# EAGLE board PCB (EAGLE 9.7.0)
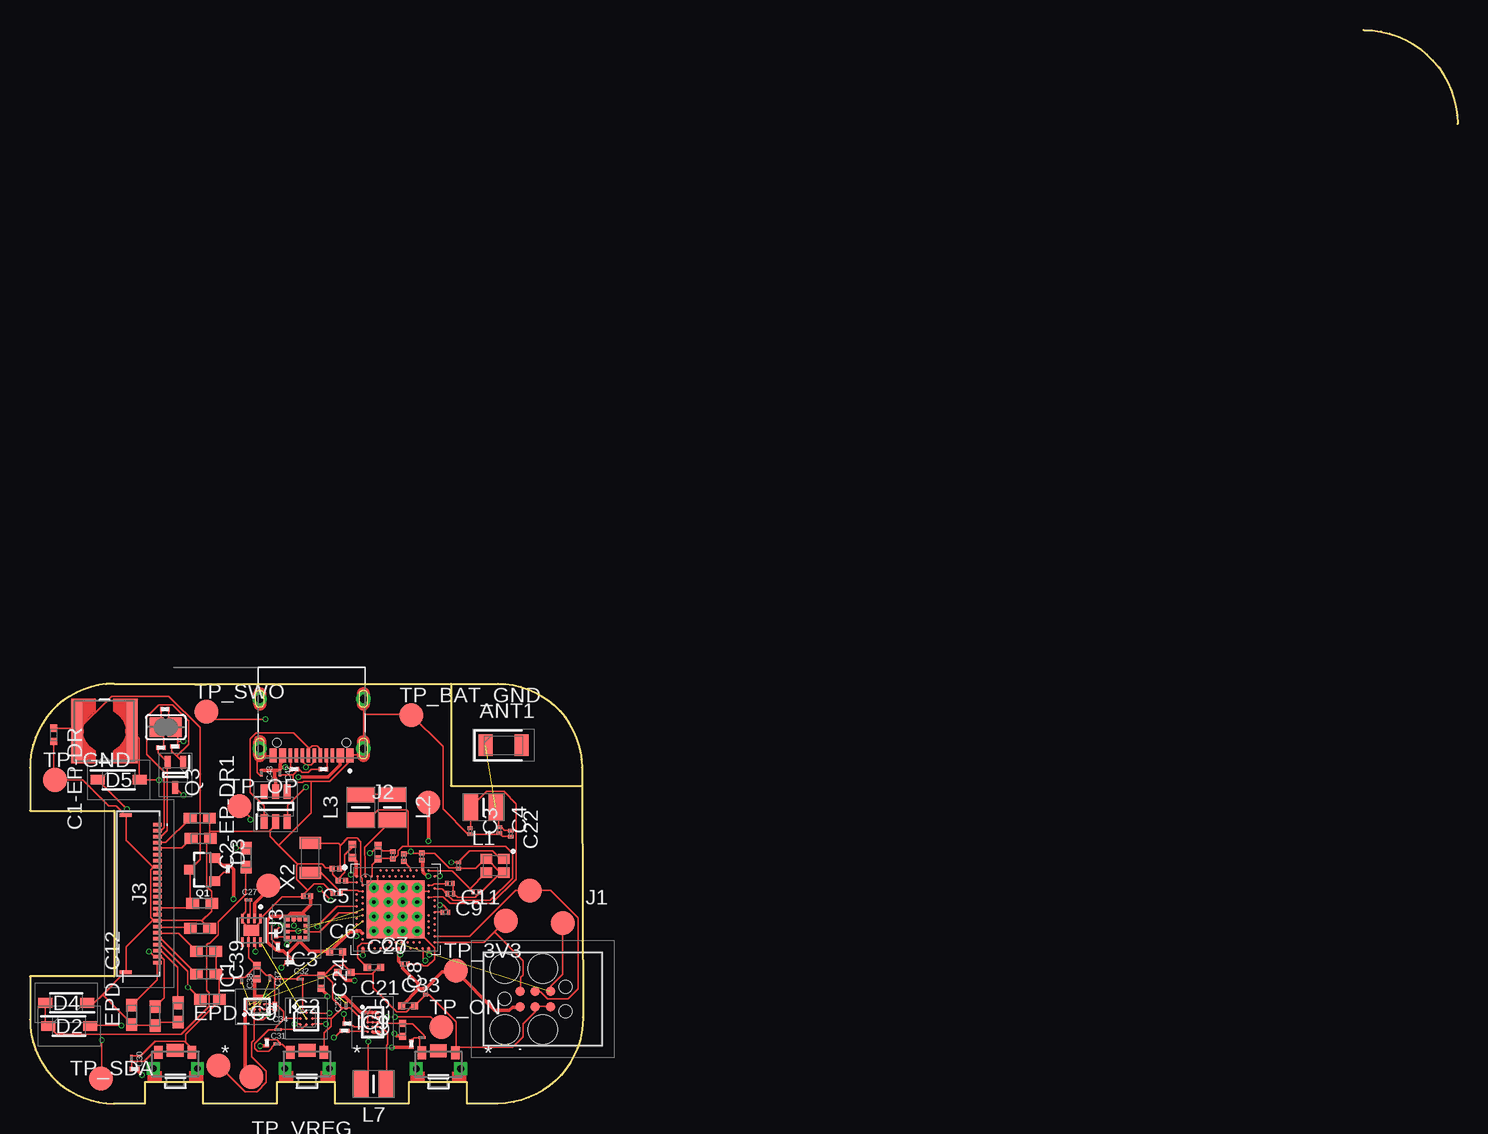
[diagram p0: board, top side]
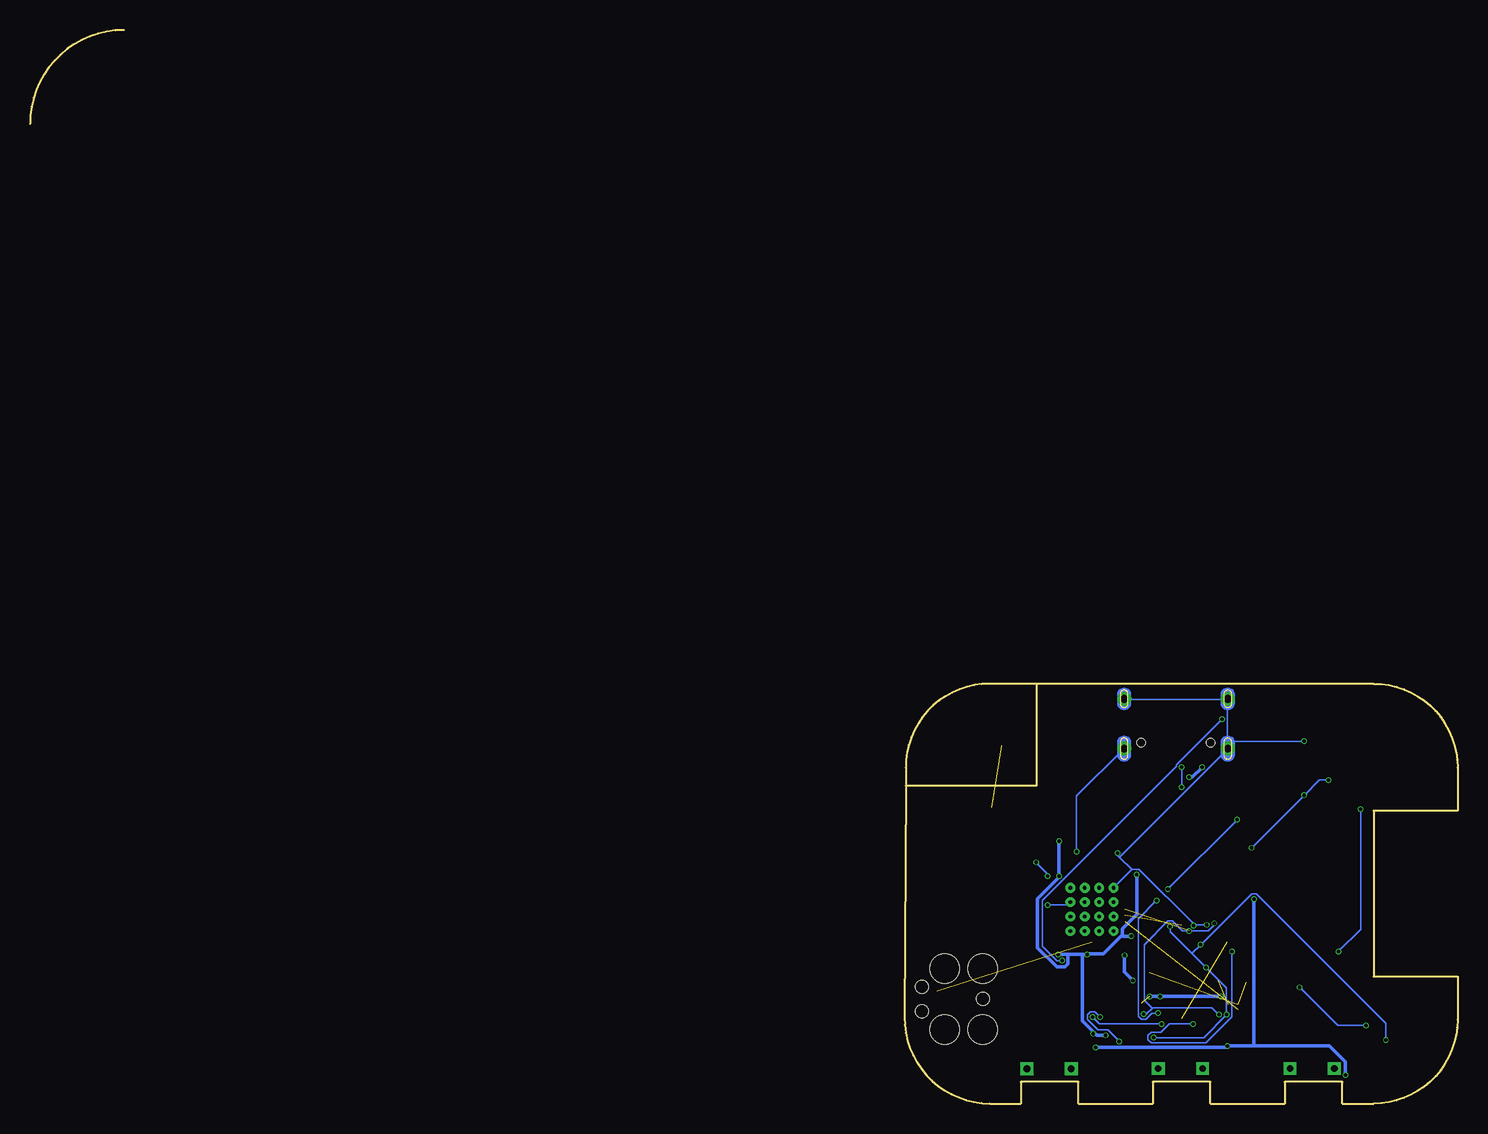
[diagram p1: board, bottom side, seen from below]

Size 119 x 89.5 mm. Coordinates in mm from the lower left corner, seen from the top.
Outline: 111.17,89.5 arc-90 119,81.67
Outline: 35.1,35 7,35 arc90 0,28 0,24.4 7,24.4 7,10.6 0,10.6 0,7 arc90 7,0 9.6,0 9.6,1.8 14.4,1.8 14.4,0 20.6,0 20.6,1.8 25.4,1.8 25.4,0 31.6,0 31.6,1.8 36.4,1.8 36.4,0 39,0 arc90 46.1,7.2 46,26.5
Outline: 35.1,35 35.1,26.5 46,26.5
Outline: 35.1,35 39,35 arc-90 46,28 46,26.5
Copper layers (1*16): Top / Bottom
Stack-up Default Layer Stack: Top User Defined 0.035mm / Dielectric-1 User Defined 1.6mm / Bottom User Defined 0.035mm
Design rules: minimum copper width classes=1 0.3mm, minimum copper width 5mil, minimum drill size 0.3mm, copper clearance wire_polygon to wire_polygon 5mil, copper clearance wire_polygon to pad_smd 5mil, copper clearance wire_polygon to via 5mil, copper clearance pad_smd to pad_smd 5mil, copper clearance pad_smd to via 5mil, copper clearance via to via 5mil, copper clearance smd to pad (same net) 5mil, copper clearance smd to via (same net) 5mil, copper clearance smd to smd (same net) 5mil, dimension clearance 0.2mm, restrict clearance 0mil, via restrict clearance 0mil, drill distance 6mil, keepout clearance 0mil
Net classes: 1 traseedeputere: width 0.3 mm

## Footprints (pad centres in the part's own frame; a part is rotated, then mirrored left to right if it is on the bottom)
2450AT18B100E_ANTC3216X140N = smd 1.15 x 1.8: 1 -1.5,0; 2 1.5,0
NORDIC_NRF_3_RESC0201_L = smd 0.28 x 0.43: 1 -0.255,0; 2 0.255,0
NORDIC_NRF_3_RESC0402_N = smd 0.6 x 0.6: 1 -0.55,0; 2 0.55,0
NORDIC_NRF_3_RESC0603_N = smd 1.05 x 0.9: 1 -0.8,0; 2 0.8,0
NORDIC_NRF_3_RESC0201_N = smd 0.4 x 0.45: 1 -0.305,0; 2 0.305,0
GRM011R60J152KE01L_2_CAPC0201X13N = smd 0.22 x 0.23: 1 -0.185,0; 2 0.185,0
ESP32_C6_LIBRARY_5_SOD3716X135N = smd 1.15 x 0.8: 1 -1.75,0; 2 1.75,0
ESP32_C6_LIBRARY_3_SOT95P280X145-6N = smd 1.2 x 0.6: 1 -1.25,0.95; 2 -1.25,0; 3 -1.25,-0.95; 4 1.25,-0.95; 5 1.25,0; 6 1.25,0.95
BQ25180YBGR_BGA8C40P2X4_100X155X50 = smd 0.2 x 0.2: A1 -0.2,0.6; A2 0.2,0.6; B1 -0.2,0.2; B2 0.2,0.2; C1 -0.2,-0.2; C2 0.2,-0.2; D1 -0.2,-0.6; D2 0.2,-0.6
DRV2605YZFR_BGA9C50P3X3_144X144X62 = smd 0.25 x 0.25: A1 -0.5,0.5; A2 0,0.5; A3 0.5,0.5; B1 -0.5,0; B2 0,0; B3 0.5,0; C1 -0.5,-0.5; C2 0,-0.5; C3 0.5,-0.5
BMA423_BMA423 = smd 0.3 x 0.35: 1 -0.75,-0.775; 2 -0.25,-0.775; 3 0.25,-0.775; 4 0.75,-0.775; 7 0.75,0.775; 8 0.25,0.775; 9 -0.25,0.775; 10 -0.75,0.775 | smd 0.35 x 0.3: 5 0.775,-0.25; 6 0.775,0.25; 11 -0.775,0.25; 12 -0.775,-0.25
RT6160AWSC_BGA15C40P3X5_140X230X60 = smd 0.216 x 0.216: A1 -0.4,0.8; A2 0,0.8; A3 0.4,0.8; B1 -0.4,0.4; B2 0,0.4; B3 0.4,0.4; C1 -0.4,0; C2 0,0; C3 0.4,0; D1 -0.4,-0.4; D2 0,-0.4; D3 0.4,-0.4; E1 -0.4,-0.8; E2 0,-0.8; E3 0.4,-0.8
TC2030-IDC_TC2030IDC = smd 0.783 x 0.783: 1 -0.953,-0.635; 2 -0.953,0.635; 3 0.317,-0.635; 4 0.317,0.635; 5 1.588,-0.635; 6 1.588,0.635 | hole 2.451: -2.223,-2.54; -2.223,2.54; 0.952,-2.54; 0.952,2.54 | hole 1.067: -2.223,0; 2.857,-1.016; 2.857,1.016
KH-TYPE-C-16P_KINGHELM_KH-TYPE-C-16P = smd 0.6 x 1.15: A1_B12 -3.2,4.725; A4_B9 -2.4,4.725; A9_B4 2.4,4.725; A12_B1 3.2,4.725 | smd 0.3 x 1.15: A5 -1.25,4.725; A6 -0.25,4.725; A7 0.25,4.725; A8 1.25,4.725; B5 1.75,4.725; B6 0.75,4.725; B7 -0.75,4.725; B8 -1.75,4.725 | drill 0.65 pad 1.05: SH1 -4.32,0; SH2 4.32,0; SH3 -4.32,4.15; SH4 4.32,4.15 | hole 0.7: -2.89,3.65; 2.89,3.65
503480-2400_5034802400 = smd 0.3 x 0.7: 1 -5.75,1.525; 2 -5.25,1.525; 3 -4.75,1.525; 4 -4.25,1.525; 5 -3.75,1.525; 6 -3.25,1.525; 7 -2.75,1.525; 8 -2.25,1.525; 9 -1.75,1.525; 10 -1.25,1.525; 11 -0.75,1.525; 12 -0.25,1.525; 13 0.25,1.525; 14 0.75,1.525; 15 1.25,1.525; 16 1.75,1.525; 17 2.25,1.525; 18 2.75,1.525; 19 3.25,1.525; 20 3.75,1.525; 21 4.25,1.525; 22 4.75,1.525; 23 5.25,1.525; 24 5.75,1.525 | smd 0.3 x 1: MP1 -6.54,-1.125; MP2 6.54,-1.125
MLP2016SR47MT0S1_INDC2016X100N = smd 1.2 x 2.2: 1 -1.028,0; 2 1.028,0
ESP32_C6_LIBRARY_2_IND_4828-WE-TPC_WRE = smd 0.9 x 5.3: 1 -2.286,0; 2 2.286,0
ESP32_C6_LIBRARY_4_ESP32_C6_LIBRARY_4_ESP32_C6_LIBRARY_4_ESP32_C6_LIBRARY_4_ESP32_WROVER_SPARKFUN-DISCRETESEMI_SOT23-3 = smd 0.8 x 0.9: 1 -0.95,-1; 2 0.95,-1; 3 0,1.1
ESP32_C6_LIBRARY_6_SOT65P210X110-3N = smd 1.05 x 0.5: 1 -1.05,0.65; 2 -1.05,-0.65; 3 1.05,0
CPF0201D7K68C1_0201 = smd 0.35 x 0.25: 1 0,0.275; 2 0,-0.275
ERA-1AEB3401C_0201 = smd 0.35 x 0.25: 1 0,0.275; 2 0,-0.275
ESP32_C6_LIBRARY_7_JUMPER_SJ = smd 1.168 x 1.6: 1 -0.762,0; 2 0.762,0
2025-10-22_07-23-44_LIBRARY_SW_EVP-AKE31A_PAN = smd 0.711 x 1.092: 1 -1.4,-0.972; 2 1.4,-0.972 | drill 0.559 pad 0.914 square: 3 -1.848,0.381; 4 1.848,0.381 | smd 1.397 x 1.092: 5 0,-1.124
HECTOR_WATCH_1_TP20R = smd 2 x 2: TP 0,0
ESP32_C6_LIBRARY_SON50P200X200X80-9N = smd 0.76 x 0.27: 1 -0.985,0.75; 2 -0.985,0.25; 3 -0.985,-0.25; 4 -0.985,-0.75; 5 0.985,-0.75; 6 0.985,-0.25; 7 0.985,0.25; 8 0.985,0.75 | smd 0.9 x 1.3: 9 0,0
NORDIC_NRF_4_AQFN50P700X700X85_HS-74N = smd 4.85 x 4.85: P$74 0,0 | drill 0.3 pad 0.6: P$75 -1.8,1.8; P$76 -0.6,1.8; P$77 0.6,1.8; P$78 1.8,1.8; P$79 -1.8,0.6; P$80 -0.6,0.6; P$81 0.6,0.6; P$82 1.8,0.6; P$83 -1.8,-0.6; P$84 -0.6,-0.6; P$85 0.6,-0.6; P$86 1.8,-0.6; P$87 -1.8,-1.8; P$88 -0.6,-1.8; P$89 0.6,-1.8; P$90 1.8,-1.8 | smd 0.2 x 0.2: P$A8 -1.25,3.25; P$A10 -0.75,3.25; P$A12 -0.25,3.25; P$A14 0.25,3.25; P$A16 0.75,3.25; P$A18 1.25,3.25; P$A20 1.75,3.25; P$A22 2.25,3.25; P$A23 2.75,3.25; P$AA24 3.25,-2.25; P$AB2 -2.75,-2.5; P$AC5 -2,-2.75; P$AC9 -1,-2.75; P$AC11 -0.5,-2.75; P$AC13 0,-2.75; P$AC15 0.5,-2.75; P$AC17 1,-2.75; P$AC19 1.5,-2.75; P$AC21 2,-2.75; P$AC24 3.25,-2.75; P$AD2 -2.75,-3.25; P$AD4 -2.25,-3.25; P$AD6 -1.75,-3.25; P$AD8 -1.25,-3.25; P$AD10 -0.75,-3.25; P$AD12 -0.25,-3.25; P$AD14 0.25,-3.25; P$AD16 0.75,-3.25; P$AD18 1.25,-3.25; P$AD20 1.75,-3.25; P$AD22 2.25,-3.25; P$AD23 2.75,-3.25; P$B1 -3.25,2.75; P$B3 -2.5,2.75; P$B5 -2,2.75; P$B7 -1.5,2.75; P$B9 -1,2.75; P$B11 -0.5,2.75; P$B13 0,2.75; P$B15 0.5,2.75; P$B17 1,2.75; P$B19 1.5,2.75; P$B24 3.25,2.75; P$C1 -3.25,2.25; P$D2 -2.75,2; P$D23 2.75,2; P$E24 3.25,1.75; P$F2 -2.75,1.5; P$F23 2.75,1.5; P$G1 -3.25,1.25; P$H2 -2.75,1; P$H23 2.75,1; P$J1 -3.25,0.75; P$J24 3.25,0.75; P$K2 -2.75,0.5; P$L1 -3.25,0.25; P$L24 3.25,0.25; P$M2 -2.75,0; P$N1 -3.25,-0.25; P$N24 3.25,-0.25; P$P2 -2.75,-0.5; P$P23 2.75,-0.5; P$R1 -3.25,-0.75; P$R24 3.25,-0.75; P$T2 -2.75,-1; P$T23 2.75,-1; P$U1 -3.25,-1.25; P$U24 3.25,-1.25; P$V23 2.75,-1.5; P$W1 -3.25,-1.75; P$W24 3.25,-1.75; P$Y2 -2.75,-2; P$Y23 2.75,-2
NORDIC_NRF_BT-XTAL_2016_N = smd 0.95 x 0.85: 1 -0.725,-0.575; 2 0.725,-0.575; 3 0.725,0.575; 4 -0.725,0.575
NORDIC_NRF_1_XTAL_3215_N = smd 1 x 1.8: 1 -1.25,0; 2 1.25,0

## Placement (x,y rotation side)
ANT1  2450AT18B100E_2450AT18B100E  [2450AT18B100E_ANTC3216X140N]  39.48,29.86 0 top
C1  12pF  [NORDIC_NRF_3_RESC0201_L]  35.72,19.85 270 top
C1-EP-DR  10uF  [NORDIC_NRF_3_RESC0402_N]  1.97,30.75 270 top
C2  12pF  [NORDIC_NRF_3_RESC0201_L]  37.19,17.65 0 top
C2-EP-DR1  4.7u/25V  [NORDIC_NRF_3_RESC0603_N]  18.02,20.51 90 top
C3  1pF  [NORDIC_NRF_3_RESC0201_L]  36.7,22.7 270 top
C4  1pF  [NORDIC_NRF_3_RESC0201_L]  39.12,22.8 270 top
C5  100nF  [NORDIC_NRF_3_RESC0201_N]  26,18.6 180 top
C6  4.7µF  [NORDIC_NRF_3_RESC0402_N]  25.52,12.65 0 top
C7  100nF  [NORDIC_NRF_3_RESC0201_L]  31.24,11.65 0 top
C8  100nF  [NORDIC_NRF_3_RESC0201_L]  32.99,9.35 270 top
C9  820pF  [NORDIC_NRF_3_RESC0201_L]  34.64,15.95 0 top
C10  N.C.  [NORDIC_NRF_3_RESC0201_L]  35.06,17.5 0 top
C11  100pF  [NORDIC_NRF_3_RESC0201_L]  34.99,18.35 180 top
C12  100nF  [NORDIC_NRF_3_RESC0201_N]  32.65,20.6 90 top
C13  N.C  [NORDIC_NRF_3_RESC0201_N]  31.17,20.5 90 top
C14  4.7µF  [NORDIC_NRF_3_RESC0402_N]  26.87,21.05 90 top
C15  1.0µF  [NORDIC_NRF_3_RESC0402_N]  29.02,20.95 90 top
C16  47nF  [NORDIC_NRF_3_RESC0201_N]  30.25,20.7 90 top
C17  12pF  [NORDIC_NRF_3_RESC0201_N]  25.5,19.6 0 top
C18  12pF  [NORDIC_NRF_3_RESC0201_N]  25.55,17.52 0 top
C19  100nF  [NORDIC_NRF_3_RESC0201_N]  23.1,17.3 180 top
C20  4.7µF  [NORDIC_NRF_3_RESC0402_N]  28.67,11.35 0 top
C21  4.7µF  [NORDIC_NRF_3_RESC0402_N]  26.22,10.95 0 top
C22  N.C.  [NORDIC_NRF_3_RESC0201_L]  40.08,22.5 270 top
C23  0.1uF  [GRM011R60J152KE01L_2_CAPC0201X13N]  26.35,8.17 90 top
C24  10uF  [NORDIC_NRF_3_RESC0402_N]  24.27,10.15 270 top
C25  22uF  [NORDIC_NRF_3_RESC0402_N]  31.07,6.15 90 top
C27  0.1uF  [GRM011R60J152KE01L_2_CAPC0201X13N]  18.21,16.97 0 top
C29  1uF  [GRM011R60J152KE01L_2_CAPC0201X13N]  32.67,5.51 180 top
C30  1uF  [GRM011R60J152KE01L_2_CAPC0201X13N]  8.45,3.77 270 top
C31  1uF  [GRM011R60J152KE01L_2_CAPC0201X13N]  20.61,4.97 0 top
C32  1uF  [GRM011R60J152KE01L_2_CAPC0201X13N]  22.53,10.37 0 top
C33  22uF  [NORDIC_NRF_3_RESC0402_N]  31.52,8.15 0 top
C34  0.1uF  [GRM011R60J152KE01L_2_CAPC0201X13N]  20.67,6.17 0 top
C37  1uF  [GRM011R60J152KE01L_2_CAPC0201X13N]  19.99,10.47 270 top
C38  1uF  [GRM011R60J152KE01L_2_CAPC0201X13N]  17.65,10.27 270 top
C39  10uF  [NORDIC_NRF_3_RESC0402_N]  18.92,10.95 90 top
C42  0.1uF  [GRM011R60J152KE01L_2_CAPC0201X13N]  20.83,27.57 270 top
C43  4.7uF  [GRM011R60J152KE01L_2_CAPC0201X13N]  19.29,27.57 270 top
D2  MBR0530  [ESP32_C6_LIBRARY_5_SOD3716X135N]  3.26,6.46 0 top
D3  ESP32_C6_LIBRARY_3_USBLC6-2SC6Y  [ESP32_C6_LIBRARY_3_SOT95P280X145-6N]  20.48,24.76 90 top
D4  MBR0530  [ESP32_C6_LIBRARY_5_SOD3716X135N]  3.02,8.4 180 top
D5  MBR0530  [ESP32_C6_LIBRARY_5_SOD3716X135N]  7.39,26.99 0 top
EPD_C1  1uF/50V  [NORDIC_NRF_3_RESC0603_N]  14.24,22.1 180 top
EPD_C2  1uF/50V  [NORDIC_NRF_3_RESC0603_N]  14.15,23.8 180 top
EPD_C5  1uF/50V  [NORDIC_NRF_3_RESC0603_N]  14.36,16.7 180 top
EPD_C6  1uF/50V  [NORDIC_NRF_3_RESC0603_N]  14.18,14.6 180 top
EPD_C7  1uF/50V  [NORDIC_NRF_3_RESC0603_N]  14.68,12.7 180 top
EPD_C8  1uF/50V  [NORDIC_NRF_3_RESC0603_N]  14.69,10.8 180 top
EPD_C9  1uF/50V  [NORDIC_NRF_3_RESC0603_N]  15,8.7 180 top
EPD_C10  1uF/50V  [NORDIC_NRF_3_RESC0603_N]  12.35,7.6 90 top
EPD_C11  1uF/50V  [NORDIC_NRF_3_RESC0603_N]  10.43,7.3 90 top
EPD_C12  1uF/50V  [NORDIC_NRF_3_RESC0603_N]  8.49,7.4 90 top
IC1  BQ25180YBGR_BQ25180YBGR  [BQ25180YBGR_BGA8C40P2X4_100X155X50]  18.93,8.06 90 top
IC2  DRV2605YZFR_DRV2605YZFR  [DRV2605YZFR_BGA9C50P3X3_144X144X62]  23.03,7.08 0 top
IC3  BMA423_BMA423  [BMA423_BMA423]  22.23,14.6 0 top
IC9  RT6160AWSC_RT6160AWSC  [RT6160AWSC_BGA15C40P3X5_140X230X60]  28.56,6.78 0 top
J1  TC2030-IDC_TC2030-IDC  [TC2030-IDC_TC2030IDC]  41.8,8.71 0 top
J2  KH-TYPE-C-16P_KH-TYPE-C-16P  [KH-TYPE-C-16P_KINGHELM_KH-TYPE-C-16P]  23.47,33.74 180 top
J3  503480-2400_503480-2400  [503480-2400_5034802400]  9.1,17.5 270 top
L1  3.9nH  [MLP2016SR47MT0S1_INDC2016X100N]  37.8,24.7 0 top
L2  10µH  [MLP2016SR47MT0S1_INDC2016X100N]  30.2,24.7 90 top
L3  15nH  [MLP2016SR47MT0S1_INDC2016X100N]  27.57,24.68 270 top
L5  68uH  [ESP32_C6_LIBRARY_2_IND_4828-WE-TPC_WRE]  6.21,31.06 180 top
L7  MLP2016SR47MT0S1_FTC252012SR47MBCA  [MLP2016SR47MT0S1_INDC2016X100N]  28.64,1.63 0 top
Q1  20V/4.2A/52mΩ/1.4W  [ESP32_C6_LIBRARY_4_ESP32_C6_LIBRARY_4_ESP32_C6_LIBRARY_4_ESP32_C6_LIBRARY_4_ESP32_WROVER_SPARKFUN-DISCRETESEMI_SOT23-3]  14.4,19.49 90 top
Q3  SI1308EDL-T1-GE3  [ESP32_C6_LIBRARY_6_SOT65P210X110-3N]  12.11,27.39 270 top
R1_EP_DR  0.47  [CPF0201D7K68C1_0201]  10.91,29.67 270 top
R1_USB  5k1  [ERA-1AEB3401C_0201]  24.47,27.87 90 top
R2  0  [CPF0201D7K68C1_0201]  26.23,6.07 90 top
R2_EP_DR  10k  [CPF0201D7K68C1_0201]  12.09,29.77 270 top
R2_USB  5k1  [ERA-1AEB3401C_0201]  22.05,27.87 90 top
R3  0  [CPF0201D7K68C1_0201]  20.51,14.17 0 top
R4  0  [CPF0201D7K68C1_0201]  26.47,6.67 90 top
R5  10k  [CPF0201D7K68C1_0201]  8.73,2.87 90 top
R7  10k  [CPF0201D7K68C1_0201]  31.79,4.97 0 top
R8  10k  [CPF0201D7K68C1_0201]  19.75,5.07 0 top
R9  10K  [CPF0201D7K68C1_0201]  20.41,8.07 0 top
R17  3K3  [CPF0201D7K68C1_0201]  20.67,13.07 180 top
R18  3K3  [CPF0201D7K68C1_0201]  21.63,11.77 270 top
R_PWR_EPD  10K  [CPF0201D7K68C1_0201]  16.49,19.57 180 top
R_TYPE_SEL  2.2  [CPF0201D7K68C1_0201]  11.25,32.87 270 top
SJ1  [ESP32_C6_LIBRARY_7_JUMPER_SJ]  11.32,31.38 180 top
SW_DN  2025-10-22_07-23-44_LIBRARY_EVP-AKE31ASW_EVP-AKE31A_PAN  [2025-10-22_07-23-44_LIBRARY_SW_EVP-AKE31A_PAN]  34.05,3.27 180 top
SW_ENT  2025-10-22_07-23-44_LIBRARY_EVP-AKE31ASW_EVP-AKE31A_PAN  [2025-10-22_07-23-44_LIBRARY_SW_EVP-AKE31A_PAN]  23.1,3.3 180 top
SW_UP  2025-10-22_07-23-44_LIBRARY_EVP-AKE31ASW_EVP-AKE31A_PAN  [2025-10-22_07-23-44_LIBRARY_SW_EVP-AKE31A_PAN]  12.11,3.3 180 top
TP_3.3V  HECTOR_WATCH_1_TPTP20R  [HECTOR_WATCH_1_TP20R]  33.2,25.08 0 top
TP_3V3  HECTOR_WATCH_1_TPTP20R  [HECTOR_WATCH_1_TP20R]  35.5,11.08 0 top
TP_BAT_GND  HECTOR_WATCH_1_TPTP20R  [HECTOR_WATCH_1_TP20R]  31.8,32.38 0 top
TP_GND  HECTOR_WATCH_1_TPTP20R  [HECTOR_WATCH_1_TP20R]  2.09,26.98 0 top
TP_ON  HECTOR_WATCH_1_TPTP20R  [HECTOR_WATCH_1_TP20R]  34.28,6.37 0 top
TP_OP  HECTOR_WATCH_1_TPTP20R  [HECTOR_WATCH_1_TP20R]  17.46,24.78 0 top
TP_RESET  HECTOR_WATCH_1_TPTP20R  [HECTOR_WATCH_1_TP20R]  44.42,15.03 0 top
TP_SCL  HECTOR_WATCH_1_TPTP20R  [HECTOR_WATCH_1_TP20R]  15.72,3.18 0 top
TP_SDA  HECTOR_WATCH_1_TPTP20R  [HECTOR_WATCH_1_TP20R]  5.92,2.08 0 top
TP_SWDCLK  HECTOR_WATCH_1_TPTP20R  [HECTOR_WATCH_1_TP20R]  41.69,17.76 0 top
TP_SWDIO  HECTOR_WATCH_1_TPTP20R  [HECTOR_WATCH_1_TP20R]  39.65,15.23 0 top
TP_SWO  HECTOR_WATCH_1_TPTP20R  [HECTOR_WATCH_1_TP20R]  14.69,32.68 0 top
TP_VBAT  HECTOR_WATCH_1_TPTP20R  [HECTOR_WATCH_1_TP20R]  19.88,18.18 0 top
TP_VREG  HECTOR_WATCH_1_TPTP20R  [HECTOR_WATCH_1_TP20R]  18.46,2.23 0 top
U3  ESP32_C6_LIBRARY_MAX17048G+T10  [ESP32_C6_LIBRARY_SON50P200X200X80-9N]  18.47,14.44 270 top
U$1  NORDIC_NRF_4_NRF52840_QF  [NORDIC_NRF_4_AQFN50P700X700X85_HS-74N]  30.47,16.18 0 top
X1  32MHz  [NORDIC_NRF_BT-XTAL_2016_N]  38.76,19.83 180 top
X2  32.768kHz  [NORDIC_NRF_1_XTAL_3215_N]  23.37,20.5 90 top

## Library data of the parts
ANT1 = InkTime_v5; ARROW_PART_NUMBER: 2450AT18B100E; ARROW_PRICE-STOCK: https://www.arrow.com/en/products/2450at18b100e/johanson-dielectrics?utm_currency=USD&region=nac; DESCRIPTION: Antennas 2.45GHz ANTENNA; HEIGHT: 1.4mm; MANUFACTURER_NAME: JOHANSON TECHNOLOGY; MANUFACTURER_PART_NUMBER: 2450AT18B100E; MOUSER_PART_NUMBER: 609-2450AT18B100E; MOUSER_PRICE-STOCK: https://www.mouser.co.uk/ProductDetail/Johanson-Technology/2450AT18B100E?qs=yCnrNFeXz%252Bh5MFsFIXGZGA%3D%3D
C1 C1-EP-DR C2 C2-EP-DR1 C3-C22 C24 C25 C33 C39 EPD_C1 EPD_C2 EPD_C5-EPD_C12 R1_EP_DR R1_USB R2 R2_EP_DR R2_USB R3-R5 R7-R9 R17 R18 R_PWR_EPD R_TYPE_SEL SJ1 TP_3.3V TP_3V3 TP_BAT_GND TP_GND TP_ON TP_OP TP_RESET TP_SCL TP_SDA TP_SWDCLK TP_SWDIO TP_SWO TP_VBAT TP_VREG U$1 X1 X2 = InkTime_v5
C23 C27 C29-C32 C34 C37 C38 C42 C43 = InkTime_v5; AVAILABILITY: In Stock; CHECK_PRICES: https://www.snapeda.com/parts/GRM011R60J152KE01L/Murata/view-part/?ref=eda; DESCRIPTION: SMD Capacitor X5R(EIA) with Capacitance: 1500pF Tol. 10%. Rated Voltage: 6.3Vdc; MF: Murata; MP: GRM011R60J152KE01L; PACKAGE: 0201 Murata; PRICE: None; SNAPEDA_LINK: https://www.snapeda.com/parts/GRM011R60J152KE01L/Murata/view-part/?ref=snap
D2 D4 D5 = InkTime_v5; AVAILABILITY: In Stock; CHECK_PRICES: https://www.snapeda.com/parts/MBR0530/Onsemi/view-part/?ref=eda; DESCRIPTION: Diode Schottky 30 V 500mA Surface Mount SOD-123; MF: ON Semiconductor; MP: MBR0530; PACKAGE: SOD-123-2 ON Semiconductor; PRICE: None; PURCHASE-URL: https://www.snapeda.com/api/url_track_click_mouser/?unipart_id=179458&manufacturer=ON Semiconductor&part_name=MBR0530&search_term=None; SNAPEDA_LINK: https://www.snapeda.com/parts/MBR0530/Onsemi/view-part/?ref=snap
D3 = InkTime_v5; AVAILABILITY: In Stock; CHECK_PRICES: https://www.snapeda.com/parts/USBLC6-2SC6Y/STMicroelectronics/view-part/?ref=eda; DESCRIPTION: 17V Clamp 5A (8/20µs) Ipp Tvs Diode Surface Mount SOT-23-6; MF: STMicroelectronics; MP: USBLC6-2SC6Y; PACKAGE: SOT-23-6 STMicroelectronics; PRICE: None; SNAPEDA_LINK: https://www.snapeda.com/parts/USBLC6-2SC6Y/STMicroelectronics/view-part/?ref=snap
IC1 = InkTime_v5; ARROW_PART_NUMBER: BQ25180YBGR; ARROW_PRICE-STOCK: https://www.arrow.com/en/products/bq25180ybgr/texas-instruments?utm_currency=USD&region=nac; DESCRIPTION: Charger IC Lithium Ion/Polymer, Lithium Iron Phosphate 8-DSBGA (1.6x1.1); HEIGHT: 0.5mm; MANUFACTURER_NAME: Texas Instruments; MANUFACTURER_PART_NUMBER: BQ25180YBGR; MOUSER_PART_NUMBER: 595-BQ25180YBGR; MOUSER_PRICE-STOCK: https://www.mouser.co.uk/ProductDetail/Texas-Instruments/BQ25180YBGR?qs=doiCPypUmgEWjAK%252BJAX6Tw%3D%3D
IC2 = InkTime_v5; ARROW_PART_NUMBER: DRV2605YZFR; ARROW_PRICE-STOCK: https://www.arrow.com/en/products/drv2605yzfr/texas-instruments?region=nac; DESCRIPTION: Haptic Driver for ERM/LRA with Built-In Library and Smart Loop Architecture; HEIGHT: 0.625mm; MANUFACTURER_NAME: Texas Instruments; MANUFACTURER_PART_NUMBER: DRV2605YZFR
IC3 = InkTime_v5; ARROW_PART_NUMBER: BMA423; ARROW_PRICE-STOCK: https://www.arrow.com/en/products/bma423/bosch; DESCRIPTION: Accelerometers Triaxial low-g 12bit Acceleration Sensor; HEIGHT: 1mm; MANUFACTURER_NAME: BOSCH; MANUFACTURER_PART_NUMBER: BMA423; MOUSER_PART_NUMBER: 262-BMA423; MOUSER_PRICE-STOCK: https://www.mouser.co.uk/ProductDetail/Bosch-Sensortec/BMA423?qs=HXFqYaX1Q2xC%252BSgeGoX3mg%3D%3D
IC9 = InkTime_v5; DESCRIPTION: Buck-Boost Regulator Positive Output Step-Up/Step-Down I2C DC-DC Controller IC 15-WL-CSP (BSC) (1.4x2.3); HEIGHT: 0.6mm; MANUFACTURER_NAME: RICHTEK; MANUFACTURER_PART_NUMBER: RT6160AWSC; MOUSER_PART_NUMBER: 835-RT6160AWSC; MOUSER_PRICE-STOCK: https://www.mouser.co.uk/ProductDetail/Richtek/RT6160AWSC?qs=amGC7iS6iy%2FLd9PSoixZXQ%3D%3D
J1 = InkTime_v5; DESCRIPTION: CABLE ADAPTER 6 POS; HEIGHT: 19mm; MANUFACTURER_NAME: Tag Connect; MANUFACTURER_PART_NUMBER: TC2030-IDC
J2 = InkTime_v5; AVAILABILITY: Not in stock; CHECK_PRICES: https://www.snapeda.com/parts/KH-TYPE-C-16P/Kinghelm/view-part/?ref=eda; MF: kinghelm; MP: KH-TYPE-C-16P; PACKAGE: None; PRICE: None; SNAPEDA_LINK: https://www.snapeda.com/parts/KH-TYPE-C-16P/Kinghelm/view-part/?ref=snap
J3 = InkTime_v5; DESCRIPTION: FFC & FPC Connectors 0.5mm FPC RA SMT Dual Contact 24Ckt; HEIGHT: 1.87mm; MANUFACTURER_NAME: Molex; MANUFACTURER_PART_NUMBER: 503480-2400; MOUSER_PART_NUMBER: 538-503480-2400; MOUSER_PRICE-STOCK: https://www.mouser.co.uk/ProductDetail/Molex/503480-2400?qs=OAhjpuo3Vu7efIoxFh9AOw%3D%3D
L1-L3 L7 = InkTime_v5; DESCRIPTION: SMD / SMT Inductors (Coils), L=0.47?H, L x W x T :; HEIGHT: 1mm; JLCPCB: https://jlcpcb.com/partdetail/6763488-FTC252012SR47MBCA/C5832368; MANUFACTURER_NAME: TDK; MANUFACTURER_PART_NUMBER: FTC252012SR47MBCA
L5 = InkTime_v5; COPYRIGHT: Copyright (C) 2024 Ultra Librarian. All rights reserved.; MANUFACTURER_PART_NUMBER: 744043680; MFR_NAME: Wurth Electronics
Q1 = InkTime_v5; PROD_ID: TRAN-14388
Q3 = InkTime_v5; AVAILABILITY: In Stock; CHECK_PRICES: https://www.snapeda.com/parts/SI1308EDL-T1-GE3/Vishay+Siliconix/view-part/?ref=eda; DESCRIPTION: Si1308EDL-T1-GE3 N-channel MOSFET Transistor, 1.5 A, 30 V, 3-Pin SC-70 | Siliconix / Vishay SI1308EDL-T1-GE3; MF: Vishay Siliconix; MP: SI1308EDL-T1-GE3; PACKAGE: SOT-323 Vishay Semiconductor; PRICE: None; PURCHASE-URL: https://www.snapeda.com/api/url_track_click_mouser/?unipart_id=274603&manufacturer=Vishay Siliconix&part_name=SI1308EDL-T1-GE3&search_term=None; SNAPEDA_LINK: https://www.snapeda.com/parts/SI1308EDL-T1-GE3/Vishay+Siliconix/view-part/?ref=snap
SW_DN SW_ENT SW_UP = InkTime_v5; COPYRIGHT: Copyright (C) 2025 Ultra Librarian. All rights reserved.; DIGI-KEY_PART_NUMBER_1: P123437TR-ND; DIGI-KEY_PART_NUMBER_2: P123437CT-ND; DIGI-KEY_PART_NUMBER_3: P123437DKR-ND; MANUFACTURER_NAME: Panasonic; MANUFACTURER_PART_NUMBER: EVP-AKE31A
U3 = InkTime_v5; AVAILABILITY: In Stock; CHECK_PRICES: https://www.snapeda.com/parts/MAX17048G+T10/Analog+Devices/view-part/?ref=eda; DESCRIPTION: 3µA 1-Cell/2-Cell Fuel Gauge with ModelGauge; MF: Analog Devices; MP: MAX17048G+T10; PACKAGE: TDFN-8 Maxim; PRICE: None; PURCHASE-URL: https://www.snapeda.com/api/url_track_click_mouser/?unipart_id=329239&manufacturer=Analog Devices&part_name=MAX17048G+T10&search_term=None; SNAPEDA_LINK: https://www.snapeda.com/parts/MAX17048G+T10/Analog+Devices/view-part/?ref=snap

## Nets
3V3/1.7D [traseedeputere]: Q1.2 R5.2 R7.2 R8.2 R_PWR_EPD.2
3V3/2.4A [traseedeputere]: C6.1 C7.1 C8.1 C12.1 C14.1 C19.1 C25.1 C33.1 IC3.3 IC3.7 IC3.10 IC9.E2 IC9.E3 J1.1 R17.1 R18.1 TP_3.3V.TP TP_3V3.TP U$1.P$A22 U$1.P$AD14 U$1.P$AD23 U$1.P$B1 U$1.P$W1 U$1.P$Y2
ALERT/1.6C: U3.5
ALERT/2.5C: U$1.P$J24
D+/1.5D: D3.4
D+/2.7D: U$1.P$AD6
D-/1.5D: D3.6
D-/2.7D: U$1.P$AD4
DEC3: C11.2 U$1.P$D23
DEC4_6: C10.1 C15.1 C16.1 L3.2 U$1.P$B5 U$1.P$E24
DN: D3.1 J2.A7 J2.B7
DP: D3.3 J2.A6 J2.B6
EPD_3V3: C1-EP-DR.1 EPD_C5.2 J3.15 J3.16 L5.2 Q1.3
EPD_BUSY/1.5D: J3.9
EPD_BUSY/2.2D: U$1.P$AD12
EPD_CS/1.4C: J3.12
EPD_CS/2.2D: U$1.P$K2
EPD_DC/1.5D: J3.11
EPD_DC/2.2D: U$1.P$AD10
EPD_RST/1.5D: J3.10
EPD_RST/2.2D: U$1.P$AC11
GDR: J3.2 Q3.1 R2_EP_DR.2
GND: C1-EP-DR.2 C1.2 C2.2 C3.2 C4.2 C5.2 C6.2 C7.2 C8.2 C9.2 C10.2 C11.1 C12.2 C13.2 C14.2 C15.2 C16.2 C17.1 C18.1 C19.2 C20.2 C21.2 C22.2 C23.1 C24.1 C25.2 C27.1 C29.1 C30.1 C31.1 C32.1 C33.2 C34.1 C37.1 C38.1 C39.2 C42.2 C43.2 D3.2 D4.1 EPD_C1.1 EPD_C2.1 EPD_C5.1 EPD_C6.1 EPD_C7.1 EPD_C8.1 EPD_C9.1 EPD_C10.1 EPD_C11.1 EPD_C12.1 IC1.D2 IC2.B1 IC2.B3 IC3.8 IC3.9 IC9.B1 IC9.C1 IC9.C2 IC9.C3 J1.3 J1.5 J2.A1_B12 J2.A12_B1 J2.SH1 J2.SH2 J2.SH3 J2.SH4 J3.8 J3.17 J3.MP1 J3.MP2 R1_USB.1 R2_EP_DR.1 R2_USB.2 R3.1 R9.1 R_TYPE_SEL.1 SJ1.1 SW_DN.1 SW_ENT.1 SW_UP.1 TP_BAT_GND.TP TP_GND.TP U3.1 U3.4 U3.6 U3.9 U$1.P$74 U$1.P$75 U$1.P$76 U$1.P$77 U$1.P$78 U$1.P$79 U$1.P$80 U$1.P$81 U$1.P$82 U$1.P$83 U$1.P$84 U$1.P$85 U$1.P$86 U$1.P$87 U$1.P$88 U$1.P$89 U$1.P$90 U$1.P$B7 U$1.P$F23 X1.2 X1.4
HAPTIC_EN/1.4C: IC2.A1
HAPTIC_EN/2.6A: U$1.P$U1
IMU_INT1: IC3.5 U$1.P$N1
IMU_INT2: IC3.6 U$1.P$P2
LX1: IC9.B2 IC9.B3 L7.1
LX2: IC9.D2 IC9.D3 L7.2
MOSI/1.5B: J3.14
MOSI/2.2D: U$1.P$B13
N$1: C2.1 U$1.P$A23 X1.3
N$2: C1.1 U$1.P$B24 X1.1
N$3: C3.1 L1.1 U$1.P$H23
N$4: L2.1 U$1.P$B3
N$5: L2.2 L3.1
N$6: ANT1.1 C4.1 C22.1 L1.2
N$7: C20.1 U$1.P$AC5
N$8: C5.1 U$1.P$C1
N$9: C17.2 U$1.P$D2 X2.2
N$10: C18.2 U$1.P$F2 X2.1
N$11: C13.1 U$1.P$A18
N$12: IC9.D1 R4.2
N$13: IC9.E1 R2.2
N$14: IC1.D1 R9.2
N$15: IC3.1 R3.2
N$16: C2-EP-DR1.1 D2.1 D4.2
N$17: C2-EP-DR1.2 D5.2 L5.1 Q3.3
N$18: C34.2 IC2.C2
N$19: C9.1 U$1.P$N24
N$20: C32.2 IC2.A2
N$21: J2.A5 R1_USB.2
N$22: R1_EP_DR.1 R_TYPE_SEL.2 SJ1.2
N$23: C27.2 U3.3
N$26: J2.B5 R2_USB.1
N$27: EPD_C2.2 J3.4
N$28: EPD_C1.2 J3.5
N$35: EPD_C6.2 J3.18
N$36: EPD_C7.2 J3.19
N$38: EPD_C8.2 J3.20
N$40: EPD_C10.2 J3.22
N$42: EPD_C12.2 J3.24
OUT+: IC2.A3 TP_OP.TP
OUT-: IC2.C3 TP_ON.TP
P0.04: U$1.P$J1
P0.09: U$1.P$L24
P0.13/1.5D: C30.2 R5.1 SW_UP.2
P0.13/2.6C: U$1.P$AD8
P0.14/1.5D: C31.2 R8.1 SW_ENT.2
P0.14/2.7C: U$1.P$AC9
P0.19: U$1.P$AC15
P0.20: U$1.P$AD16
P0.21: U$1.P$AC17
P0.22: U$1.P$AD18
P0.23: U$1.P$AC19
P0.24: U$1.P$AD20
P0.25: U$1.P$AC21
P0.26: U$1.P$G1
P0.27: U$1.P$H2
P0.28: U$1.P$B11
P0.29: U$1.P$A10
P0.30: U$1.P$B9
P0.31: U$1.P$A8
P1.01/1.6C: Q1.1 R_PWR_EPD.1
P1.01/2.4B: U$1.P$Y23
P1.02/1.6C: C29.2 R7.1 SW_DN.2
P1.02/2.8C: U$1.P$W24
P1.03: U$1.P$V23
P1.04: U$1.P$U24
P1.05: U$1.P$T23
P1.06: U$1.P$R24
P1.07: U$1.P$P23
P1.09: U$1.P$R1
P1.10: U$1.P$A20
P1.11: U$1.P$B19
P1.12: U$1.P$B17
P1.13: U$1.P$A16
P1.14: U$1.P$B15
P1.15: U$1.P$A14
PMIC_INT: IC1.A1 U$1.P$T2
PREVGH: D5.1 EPD_C11.2 J3.23
PREVGL: D2.2 EPD_C9.2 J3.21
RESE: J3.3 Q3.2 R1_EP_DR.2
RESET: J1.6 TP_RESET.TP U$1.P$AC13
SCK/1.5B: J3.13
SCK/2.2D: U$1.P$A12
SCL/1.4C: IC2.C1 U3.7
SCL/2.4C: IC1.B1 IC3.12 R4.1 R17.2 TP_SCL.TP U$1.P$M2
SDA/1.4C: IC2.B2 U3.8
SDA/2.4C: IC1.C1 IC3.2 R2.1 R18.2 TP_SDA.TP U$1.P$L1
SWDCLK: J1.4 TP_SWDCLK.TP U$1.P$AA24
SWDIO: J1.2 TP_SWDIO.TP U$1.P$AC24
SWO: TP_SWO.TP U$1.P$AD22
VBAT/1.2A [traseedeputere]: TP_VBAT.TP U3.2
VBAT/2.5C [traseedeputere]: C37.2 IC1.C2
VBUS/1.5D [traseedeputere]: C42.1 C43.1 D3.5 J2.A4_B9 J2.A9_B4
VBUS/2.6D [traseedeputere]: C21.1 C38.2 IC1.A2 U$1.P$AD2
VREG [traseedeputere]: C23.2 C24.2 C39.1 IC1.B2 IC9.A1 IC9.A2 IC9.A3 TP_VREG.TP

## Tracks (layer width: path | path; a pad name or v marks a point on that pad's centre or on a via)
3V3/1.7D  (via drill 0.3)
  Top 0.3: Q1.2 15.44,20.42 16.02,19.85 16.46,19.85 R_PWR_EPD.2 16.59,19.79 16.71,19.79 16.97,19.53 v16.97,17.05 | v9.35,2.39 9.03,2.7 9.03,2.83 R5.2 | v19.19,4.8 19.7,4.8 R8.2 | v30.18,4.67 31.76,4.67 R7.2
  Bottom 0.3: v9.35,2.39 9.35,3.47 10.68,4.8 16.97,4.8 | 16.97,4.8 v19.19,4.8 19.25,4.67 v30.18,4.67 | 16.97,4.8 v16.97,17.05
3V3/2.4A  (via drill 0.3)
  Top 0.3: 21.54,15.6 21.54,15.66 21.73,15.85 22.75,15.85 | 21.54,15.6 21.54,15.4 IC3.10 | 22.75,15.85 22.94,15.66 22.94,15.4 IC3.7 | C19.1 23.38,17.25 23.38,16.55 22.81,15.98 22.75,15.85 | 21.38,12.45 21.86,11.98 21.86,11.79 R18.1 | 21.38,12.45 21.09,12.74 20.71,12.74 R17.1 20.52,12.8 20.46,12.8 19.76,13.5 19.76,15.28 20.08,15.6 21.54,15.6 | 22.43,13.5 22.43,13.82 IC3.3 | 21.38,12.45 22.43,13.5 | 27.25,14.39 27.51,14.39 27.7,14.2 U$1.P$Y2 | 27.25,14.39 U$1.P$W1 | 27.13,14.32 26.68,14.32 25.03,12.67 C6.1 24.84,12.67 23.32,12.67 22.55,13.44 22.43,13.5 | 27.13,14.32 27.25,14.39 | J1.1 40.84,8.04 40.21,8.04 39.95,7.78 38.75,7.78 35.51,11.02 TP_3V3.TP 35.38,10.96 34.37,10.96 33.1,9.69 C8.1 32.97,9.56 32.4,9.56 | 32.4,9.56 31,8.16 C33.1 | 27.19,19.09 27.19,20.17 26.87,20.48 C14.1 | 27.19,19.09 27.19,18.96 U$1.P$B1 | 32.72,19.47 32.72,20.23 C12.1 | 32.72,19.47 U$1.P$A22 | IC9.E2 28.59,5.94 28.91,5.94 IC9.E3 29.1,5.94 v29.35,5.69 | 30.75,12.42 30.75,11.85 30.94,11.66 C7.1 31.06,11.53 31.06,11.28 32.34,10.01 32.34,9.69 32.4,9.56 | 30.75,12.42 30.75,12.93 U$1.P$AD14 | v33.29,12.42 33.22,12.48 U$1.P$AD23 | v30.87,12.42 30.75,12.42 | v30.37,5.82 30.56,5.63 31.06,5.63 C25.1 | v33.22,18.96 33.1,18.96 32.78,19.28 32.78,19.34 32.72,19.47 | v26.75,19.09 27.19,19.09 | v33.22,21.88 33.22,25.06 TP_3.3V.TP | v27.19,13.94 27.19,14.2 27.13,14.32
  Bottom 0.3: 31.26,12.42 v30.87,12.42 30.75,12.48 29.54,12.48 27.95,14.07 | 31.26,12.42 32.46,12.42 | 32.46,12.42 v33.29,12.42 | v29.35,5.69 30.05,5.69 30.27,5.91 | 30.27,5.91 31.26,6.9 31.26,12.42 | v30.37,5.82 30.27,5.91 | 32.46,12.42 32.46,11.66 32.72,11.4 33.41,11.4 35,12.99 35,17.05 33.22,18.83 v33.22,18.96 v33.22,21.88 | v26.75,19.09 26.75,15.79 27.95,14.58 27.95,14.07 | v27.19,13.94 27.89,13.94 27.95,14.07
DEC3
  Top 0.127: U$1.P$D23 33.22,18.2 33.54,18.2 33.67,18.33 34.68,18.33 C11.2
DEC4_6
  Top 0.127: U$1.P$E24 33.73,17.88 34.37,17.88 34.75,17.5 C10.1 34.81,17.37 35.26,16.93 38.37,16.93 40.21,18.77 40.21,20.87 39.64,21.44 31.51,21.44 | U$1.P$B5 28.52,18.96 28.52,19.91 28.97,20.36 C15.1 29.03,20.42 30.24,20.42 C16.1 30.3,20.36 30.68,20.74 30.68,21.06 31.06,21.44 31.51,21.44 | 31.51,21.44 31.51,24.36 31.38,24.48 29.03,24.48 28.21,23.66 27.64,23.66 L3.2
DN
  Top 0.127: 23.29,29.6 23.51,29.82 23.95,29.82 24.21,29.56 24.21,29.06 J2.B7 | 23.29,29.6 23.25,29.56 23.25,29.06 J2.A7 | 23.29,29.6 21.98,30.9 18.87,30.9 18.36,30.39 18.36,25.95 19.51,24.8 19.51,23.53 D3.1
DP  (via drill 0.3)
  Top 0.127: 23,28.23 22.75,28.49 22.75,28.99 J2.B6 | 23,28.23 23.45,28.23 23.7,28.49 23.7,28.99 J2.A6 | v23,26.39 21.48,24.87 21.48,23.53 D3.3 | 23,28.23 v23,28.04
  Bottom 0.127: v23,28.04 v23,26.39
EPD_3V3
  Top 0.127: C1-EP-DR.1 1.98,31.28 3.7,31.28 3.89,31.09 L5.2 3.95,31.09 6.81,33.95 11.57,33.95 14.17,31.34 14.17,20.36 13.35,19.53 Q1.3 13.35,19.47 13.35,16.93 13.54,16.74 EPD_C5.2 13.54,16.67 13.16,16.29 10.68,16.29 J3.15 10.62,16.23 10.62,15.79 J3.16
GDR
  Top 0.127: 12.24,28.96 12.71,28.49 Q3.1 | 12.24,28.96 11.82,29.37 11.82,29.76 R2_EP_DR.2 | 12.24,28.96 13.22,29.95 13.22,31.91 11.89,33.25 10.74,33.25 9.73,32.23 9.73,29.12 11.19,27.66 11.19,23.02 10.94,22.77 10.68,22.77 J3.2
GND  (via drill 0.3)
  Top 0.127: v34.18,16.55 34.43,16.55 34.87,16.1 34.87,15.98 C9.2 | 28.71,18.01 28.97,18.26 28.97,18.9 U$1.P$B7 | U$1.P$F23 33.16,17.69 32.52,17.69 32.27,17.95 U$1.P$74 | C7.2 31.51,11.59 32.65,11.59 32.78,11.47 33.16,11.47 33.73,12.04 33.73,12.99 32.4,14.32 32.27,14.32 U$1.P$74 | U$1.P$74 28.65,15.53 28.65,14.39 U$1.P$87 28.71,14.39 29.86,14.39 U$1.P$88 | U$1.P$83 28.65,15.6 U$1.P$74 | U$1.P$84 29.86,15.6 29.86,15.91 U$1.P$74 | U$1.P$79 28.71,16.8 29.29,17.37 U$1.P$74 | U$1.P$80 29.86,16.8 U$1.P$74 | U$1.P$76 29.86,17.95 29.35,17.44 U$1.P$74 | U$1.P$89 31.13,14.39 31.64,14.9 U$1.P$74 | U$1.P$85 31.06,15.6 U$1.P$74 | U$1.P$81 31.06,16.8 U$1.P$74 | U$1.P$90 U$1.P$74 | U$1.P$77 31.13,17.95 31.7,17.37 U$1.P$74 | U$1.P$86 32.21,15.53 31.7,15.02 U$1.P$74 | U$1.P$78 32.27,18.01 U$1.P$74 | U$1.P$82 32.21,16.8 31.7,17.31 U$1.P$74 | C16.2 30.24,21.06 29.41,21.06 29.03,21.44 C15.2 28.97,21.44 28.4,20.87 v28.33,20.87 | IC3.8 22.43,15.4 21.98,15.4 IC3.9 21.98,15.34 v21.98,14.83 | v20.91,14.9 20.91,14.83 20.52,14.45 R3.1 | 28.71,18.01 U$1.P$74 | 28.71,18.01 U$1.P$75 | C22.2 40.02,22.26 39.38,22.26 39.13,22.52 C4.2 39.07,22.52 39,22.45 36.72,22.45 C3.2 36.65,22.45 36.52,22.45 34.43,24.55 34.43,29.76 31.83,32.36 TP_BAT_GND.TP 31.76,32.42 27.83,32.42 | 12.33,30.2 12.33,31.15 12.14,31.34 SJ1.1 12.08,31.41 11.57,31.91 11.57,32.87 R_TYPE_SEL.1 | 12.33,30.2 12.33,29.82 R2_EP_DR.1 | 18.94,28.99 18.94,29.37 19.13,29.56 J2.SH4 | 18.94,28.99 18.94,27.6 19.19,27.34 19.25,27.34 C43.2 | 18.94,28.99 20.27,28.99 J2.A12_B1 | v12.78,30.2 12.33,30.2 | C11.1 35.26,18.33 35.26,17.5 C10.2 35.64,17.18 37.1,17.18 37.41,17.5 37.41,17.63 C2.2 37.48,17.69 37.67,17.69 39.26,19.28
  Top 0.127: 31.76,20.87 32.59,20.87 C12.2 32.65,20.87 33.73,20.87 34.94,19.66 35.64,19.66 35.7,19.59 C1.2 35.76,19.59 37.16,19.59 37.99,20.42 X1.2 38.05,20.42 39.19,19.28 39.26,19.28 | 31.76,20.87 31.19,20.87 C13.2 | 39.26,19.28 39.45,19.28 X1.4 39.26,19.28 | 21.92,27.41 20.84,27.41 C42.2 | 21.92,27.41 22.36,27.85 R2_USB.2 22.43,27.85 22.68,27.6 23.19,27.6 23.45,27.85 24.14,27.85 R1_USB.1 | 27.83,32.42 27.83,33.69 J2.SH1 | 27.83,32.42 27.83,29.63 J2.SH3 27.76,29.56 27.25,29.06 26.68,29.06 J2.A1_B12 26.62,28.99 26.62,28.49 24.97,26.84 23.45,26.84 | 21.92,27.41 21.92,27.02 22.17,26.77 22.75,26.77 22.81,26.84 23.45,26.84 | v31.76,20.99 31.76,20.87 | EPD_C10.1 12.33,6.77 10.74,6.77 10.49,6.51 EPD_C11.1 10.43,6.51 8.59,6.51 8.52,6.58 EPD_C12.1 8.46,6.64 6.05,9.05 | 6.05,9.05 5.41,8.42 4.78,8.42 D4.1 | 6.05,9.05 7.95,10.96 J3.MP2 8.01,11.02 8.01,13.05 10.27,15.31 | C1-EP-DR.2 1.98,30.2 1.98,27.09 TP_GND.TP 2.11,26.96 4.39,26.96 6.55,24.8 7.19,24.8 7.95,24.04 J3.MP1 8.01,23.98 8.01,21.95 10.27,19.69 | 14.33,15.25 14.94,14.64 EPD_C6.1 | 14.33,15.25 14.3,15.28 10.68,15.28 J3.17 10.62,15.28 10.3,15.28 10.27,15.31 | 10.27,19.69 10.05,19.47 10.05,15.53 10.27,15.31 | 10.27,19.69 10.3,19.72 10.62,19.72 J3.8 | 14.33,15.25 15.13,16.04 15.13,16.67 EPD_C5.1 15.13,16.74 15.13,17.69 14.74,18.07 14.74,21.82 15,22.07 EPD_C1.1 15,22.14 15,22.71 | 15,22.71 15,23.79 EPD_C2.1 | 19.98,22.74 19.95,22.71 15,22.71 | 19.98,22.74 20.46,23.21 20.46,23.47 D3.2 | C14.2 26.81,21.56 26.81,21.31 26.24,20.74 26.24,19.28 25.67,18.71 C5.2 25.67,18.64 25.22,19.09 25.22,19.59 C17.1 25.16,19.66 24.65,19.66 24.33,19.98 22.36,19.98 22.33,19.95
  Top 0.127: 23.16,17.79 23.7,18.33 24.46,18.33 25.22,17.56 C18.1 | 23.16,17.79 22.81,17.44 C19.2 22.75,17.25 21.03,17.25 19.25,15.47 U3.1 19.19,15.4 19.19,15.09 18.49,14.39 U3.9 | C27.1 17.98,16.93 17.98,15.98 17.73,15.72 17.73,15.47 U3.4 17.73,15.4 17.73,15.15 18.43,14.45 U3.9 | U3.9 18.43,14.39 18.24,14.2 18.24,13.5 U3.6 18.24,13.44 18.24,12.17 18.87,11.53 C39.2 | 22.33,19.95 22.24,19.85 22.24,18.71 23.16,17.79 | 22.33,19.95 20.75,21.53 | 20.75,21.53 20.02,22.26 20.02,22.71 19.98,22.74 | J1.5 43.38,8.1 42.18,8.1 J1.3 42.11,8.04 42.11,7.66 41.1,6.64 41.1,5.56 40.21,4.67 35.51,4.67 | 35.51,4.67 35.51,6.83 33.29,9.05 33.03,9.05 C8.2 32.97,9.05 32.08,8.16 C33.2 32.02,8.1 31.83,8.1 31.38,7.66 30.56,7.66 28.59,9.63 28.59,10.83 28.56,10.86 | 35.51,4.67 35.51,4.29 SW_DN.1 35.51,4.67 | C29.1 32.84,5.56 32.84,5.69 31.89,6.64 31.13,6.64 C25.2 28.91,6.71 IC9.C3 28.91,6.77 28.59,6.77 IC9.C2 28.52,6.77 28.21,6.77 IC9.C1 28.14,6.83 28.14,7.15 IC9.B1 28.08,7.15 27.51,7.15 26.68,7.97 26.37,7.97 C23.1 26.3,7.97 26.05,7.97 26.02,7.94 | 25.09,7.09 25.16,7.09 26.02,7.94 | 25.09,7.09 23.57,7.09 IC2.B3 | 25.09,7.09 25.09,6.45 24.52,5.88 24.52,4.29 SW_ENT.1 | C24.1 22.55,10.71 22.36,10.52 22.36,10.39 C32.1 22.3,10.39 20.4,10.39 | 26.14,11.56 26.75,10.96 C21.2 26.81,10.9 26.87,10.83 28.52,10.83 28.56,10.86 | 26.14,11.56 26.11,11.59 26.11,12.61 C6.2 | 28.56,10.86 29.03,11.34 29.16,11.34 C20.2 | C24.1 24.52,10.71 24.56,10.74 | 24.56,10.74 25.35,11.53 26.11,11.53 26.14,11.56 | C24.1 | IC1.D2 19.57,8.29 20.4,8.29 R9.1 | C31.1 20.4,4.93 20.14,4.67 20.14,4.61 19.89,4.36 19,4.36 18.75,4.61 18.75,4.99 19.89,6.13 20.46,6.13 C34.1 20.52,6.2 20.52,6.39 21.19,7.05
  Top 0.127: 21.19,7.05 21.22,7.09 22.49,7.09 IC2.B1 | R9.1 20.46,8.29 20.59,8.16 20.65,8.16 21.16,7.66 21.16,7.09 21.19,7.05 | 12.94,5.15 13.47,4.61 13.47,4.29 SW_UP.1 | 12.94,5.15 12.9,5.18 10.43,5.18 9.22,3.97 8.46,3.97 C30.1 | C39.2 18.87,11.47 17.92,10.52 17.67,10.52 C38.1 17.6,10.45 15.76,10.45 | C39.2 18.94,11.47 19.7,10.71 19.95,10.71 C37.1 20.02,10.64 20.14,10.64 20.4,10.39 | EPD_C7.1 15.51,12.67 15.51,10.83 EPD_C8.1 | 15.76,10.45 15.76,10.52 15.51,10.77 EPD_C8.1 | 15.76,10.45 15.76,8.74 EPD_C9.1 15.76,8.67 15.76,8.55 12.97,5.75 12.97,5.18 12.94,5.15 | 15.76,10.45 EPD_C8.1 | 20.4,10.39 20.4,8.36 R9.1 | 26.02,7.94 25.22,8.74 25.22,10.07 24.56,10.74 | 23.45,26.84 23.45,24.23 20.75,21.53
  Bottom 0.127: v34.18,16.55 32.46,16.55 32.27,16.74 U$1.P$82 | v20.91,14.9 21.92,14.9 21.95,14.93 | 21.95,14.93 26.56,19.53 27.13,19.53 27.16,19.5 | 27.16,19.5 28.65,18.01 U$1.P$75 | v21.98,14.83 21.98,14.9 21.95,14.93 | v28.33,20.87 28.33,20.68 28.18,20.52 | 27.16,19.5 28.18,20.52 | 19.19,30.2 19.19,33.69 J2.SH2 19.25,33.69 27.76,33.69 J2.SH1 | 19.19,30.2 19.19,29.63 J2.SH4 19.13,29.56 28.18,20.52 | 19.19,30.2 v12.78,30.2 | v31.76,20.99 31.76,25.63 27.83,29.56 J2.SH3
IMU_INT1
  Top 0.127: U$1.P$N1 27.19,15.91 25.73,15.91 24.14,14.32 23.06,14.32 IC3.5
IMU_INT2  (1 unrouted)
LX1  (via drill 0.3)
  Top 0.127: IC9.B2 28.59,7.15 28.91,7.15 IC9.B3 28.97,7.21 v29.8,7.21 | v28.21,5.18 28.21,2.26 27.64,1.69 L7.1
  Bottom 0.127: v29.8,7.21 30.24,7.66 30.62,7.66 30.87,7.4 30.87,7.02 29.98,6.13 29.16,6.13 v28.21,5.18
LX2
  Top 0.127: IC9.D2 28.59,6.39 28.91,6.39 IC9.D3 29.29,6.39 29.8,5.88 29.8,4.93 29.73,4.86 29.73,1.69 L7.2
N$1
  Top 0.127: 36.68,17.91 36.91,17.69 C2.1 | 36.68,17.91 35.19,19.41 33.22,19.41 U$1.P$A23 | 36.68,17.91 37.99,19.21 X1.3
N$2  (via drill 0.3)
  Top 0.127: v34.18,18.96 33.73,18.96 U$1.P$B24 | v35.13,20.1 35.7,20.1 C1.1 35.76,20.17 36.65,21.06 38.56,21.06 39.19,20.42 39.45,20.42 X1.1
  Bottom 0.127: v34.18,18.96 34.18,19.15 v35.13,20.1
N$3
  Top 0.127: U$1.P$H23 33.54,17.18 33.6,17.25 34.43,17.25 35,16.67 38.49,16.67 40.53,18.71 40.53,24.99 39.51,26.01 38.05,26.01 36.78,24.74 L1.1 36.72,24.68 36.72,22.96 C3.1
N$4
  Top 0.127: U$1.P$B3 27.95,18.96 27.95,20.61 27.89,20.68 27.89,21.37 30.18,23.66 L2.1
N$5
  Top 0.127: L3.1 27.64,25.76 30.18,25.76 L2.2
N$6  (1 unrouted)
  Top 0.127: C22.1 40.02,22.77 39.57,22.77 39.32,23.02 39.13,23.02 C4.1 39.07,23.09 39.07,24.48 38.88,24.68 L1.2
N$7
  Top 0.127: U$1.P$AC5 28.46,13.37 27.64,13.37 27.32,13.05 27.32,12.17 28.08,11.4 C20.1
N$8
  Top 0.127: U$1.P$C1 27.19,18.45 26.49,18.45 26.37,18.58 C5.1
N$9
  Top 0.127: 25.89,21.53 25.86,21.5 25.86,19.66 C17.2 | 25.89,21.53 26.49,22.14 27.25,22.14 27.57,21.82 27.57,18.9 27.7,18.77 27.7,18.2 U$1.P$D2 | 25.89,21.53 25.73,21.69 23.38,21.69 X2.2
N$10
  Top 0.127: U$1.P$F2 27.7,17.69 27.38,17.69 27.32,17.75 26.05,17.75 25.86,17.56 C18.2 25.86,17.63 24.27,19.21 23.38,19.21 X2.1
N$11
  Top 0.127: U$1.P$A18 31.7,19.47 31.7,19.66 31.19,20.17 C13.1
N$12
  Top 0.127: IC9.D1 28.14,6.39 27,6.39 26.75,6.64 R4.2
N$13
  Top 0.127: IC9.E1 28.14,6.01 26.62,6.01 26.56,6.07 R2.2
N$14
  Top 0.127: IC1.D1 19.57,7.85 20.4,7.85 R9.2
N$15
  Top 0.127: IC3.1 21.48,13.88 20.52,13.88 R3.2
N$16
  Top 0.127: C2-EP-DR1.1 17.98,19.66 17.98,17.44 15.7,15.15 15.7,14.07 15,13.37 14.87,13.37 14.74,13.25 14.74,9.44 14.94,9.24 14.94,8.1 12.59,5.75 2.23,5.75 1.54,6.45 D2.1 1.47,6.51 1.28,6.71 1.28,8.36 D4.2
N$17  (via drill 0.3)
  Top 0.127: L5.1 8.52,31.02 9.09,30.45 9.09,27.02 D5.2 9.16,26.96 v10.74,26.96 | v17.16,21.31 17.98,21.31 C2-EP-DR1.2 | v12.78,25.69 12.14,26.33 Q3.3
  Bottom 0.127: v17.16,21.31 v12.78,25.69 11.51,26.96 v10.74,26.96
N$18
  Top 0.127: C34.2 20.91,6.2 22.62,6.2 23,6.58 IC2.C2
N$19
  Top 0.127: U$1.P$N24 33.73,15.98 34.37,15.98 C9.1
N$20
  Top 0.127: C32.2 22.75,10.32 22.75,7.85 23,7.59 IC2.A2
N$21
  Top 0.127: R1_USB.2 24.78,27.91 24.78,28.99 J2.A5
N$22
  Top 0.127: R_TYPE_SEL.2 10.94,32.87 10.94,31.72 10.62,31.41 SJ1.2 10.62,31.34 11.13,30.84 11.13,29.69 R1_EP_DR.1
N$23
  Top 0.127: C27.2 18.36,16.93 18.36,15.6 18.24,15.47 U3.3
N$26
  Top 0.127: R2_USB.1 21.73,27.91 21.73,28.99 J2.B5
N$27
  Top 0.127: J3.4 10.68,21.75 11.32,21.75 13.35,23.79 EPD_C2.2
N$28
  Top 0.127: J3.5 10.68,21.31 12.65,21.31 13.41,22.07 EPD_C1.2
N$35
  Top 0.127: J3.18 10.68,14.71 13.28,14.71 13.35,14.64 EPD_C6.2
N$36
  Top 0.127: J3.19 10.68,14.2 12.4,14.2 13.86,12.74 EPD_C7.2
N$38
  Top 0.127: J3.20 10.68,13.69 11,13.69 13.86,10.83 EPD_C8.2
N$40
  Top 0.127: J3.22 10.68,12.74 10.94,12.74 12.33,11.34 12.33,8.42 EPD_C10.2
N$42
  Top 0.127: J3.24 10.62,11.72 10.62,10.32 8.52,8.23 EPD_C12.2
OUT+  (via drill 0.3)
  Top 0.127: v24.97,7.53 23.57,7.53 IC2.A3 | v24.14,17.88 v25.09,16.93 | v18.36,23.66 18.36,23.85 17.48,24.74 TP_OP.TP
  Bottom 0.127: v24.97,7.53 25.48,7.53 25.98,7.02 26.37,7.02 26.62,7.28 26.62,15.4 v25.09,16.93 | v18.36,23.66 v24.14,17.88
OUT-  (via drill 0.3)
  Top 0.127: v24.65,6.64 23.57,6.64 IC2.C3 | v30.43,7.21 33.41,7.21 34.24,6.39 TP_ON.TP
  Bottom 0.127: v24.65,6.64 29.86,6.64 v30.43,7.21
P0.13/1.5D
  Top 0.127: R5.1 8.46,2.89 8.46,3.53 C30.2 8.52,3.53 9.54,3.53 10.24,4.23 10.68,4.23 SW_UP.2
P0.14/1.5D
  Top 0.127: SW_ENT.2 21.67,4.29 21.03,4.93 20.84,4.93 C31.2 20.78,4.99 20.78,5.12 20.59,5.31 19.76,5.31 R8.1
P1.01/1.6C
  Top 0.127: R_PWR_EPD.1 16.46,19.28 16.14,19.28 15.44,18.58 Q1.1
P1.02/1.6C
  Top 0.127: R7.1 31.83,5.31 32.02,5.5 32.46,5.5 C29.2 32.46,5.44 32.46,4.42 32.59,4.29 SW_DN.2
PMIC_INT  (1 unrouted)
PREVGH  (via drill 0.3)
  Top 0.127: EPD_C11.2 10.49,8.1 11.19,8.8 11.19,11.98 10.94,12.23 10.68,12.23 J3.23 10.62,12.29 10.3,12.29 v9.92,12.67 | v8.08,24.55 5.66,26.96 D5.1
  Bottom 0.127: v8.08,24.55 8.08,14.52 v9.92,12.67
PREVGL  (via drill 0.3)
  Top 0.127: 13.19,9.72 14.17,8.74 EPD_C9.2 | 13.19,9.72 13.16,9.75 13.16,11.02 10.94,13.25 10.68,13.25 J3.21 | v7.63,6.51 5.03,6.51 D2.2 | v13.16,9.69 13.19,9.72
  Bottom 0.127: v7.63,6.51 9.98,6.51 v13.16,9.69
RESE
  Top 0.127: R1_EP_DR.2 10.68,29.63 10.68,29.25 11.44,28.49 Q3.2 11.44,28.42 11.44,22.77 10.94,22.26 10.68,22.26 J3.3
RESET  (1 unrouted)
  Top 0.127: J1.6 43.45,9.37 43.45,9.82 44.4,10.77 44.4,15.02 TP_RESET.TP
SCL/1.4C  (via drill 0.3)
  Top 0.127: v22.05,6.64 22.49,6.64 IC2.C1 | v18.81,12.67 18.81,13.37 18.75,13.44 U3.7
  Bottom 0.127: v22.05,6.64 24.02,6.64 24.71,5.94 25.54,5.94 25.79,5.69 25.79,5.31 25.54,5.05 20.97,5.05 18.81,7.21 v18.81,12.67
SCL/2.4C  (via drill 0.3)  (1 unrouted)
  Top 0.127: 18.68,6.96 18.68,5.31 18.49,5.12 18.49,3.91 19.7,2.7 19.7,1.75 18.94,0.99 17.92,0.99 15.76,3.15 TP_SCL.TP | 18.68,6.96 18.68,7.85 IC1.B1 | v26.18,7.47 26.18,6.71 R4.1 | v19.89,7.4 19.44,6.96 18.68,6.96 | v20.27,15.02 20.14,14.9 20.14,13.69 20.46,13.37 20.65,13.37 R17.2 | v22.36,14.39 21.48,14.39 IC3.12
  Bottom 0.127: v26.18,7.47 25.92,7.47 25.45,7.94 | 25.45,7.94 25.41,7.97 20.46,7.97 v19.89,7.4 | v20.27,15.02 20.27,14.9 20.78,14.39 v22.36,14.39 22.94,14.39 23.76,15.21 24.14,15.21 26.11,13.25 26.11,8.61 25.45,7.94
SDA/1.4C  (1 unrouted)
SDA/2.4C  (via drill 0.3)
  Top 0.127: v19.25,7.4 19.19,7.47 19.19,7.85 IC1.C1 | v20.97,11.34 21.35,11.72 R18.2 | v23.95,14.77 25.6,16.42 27.19,16.42 U$1.P$L1 | v25.35,5.5 25.92,6.07 R2.1 | v21.41,13.25 21.54,13.25 21.92,13.63 21.92,13.82 IC3.2 | v5.98,5.31 5.98,2.13 TP_SDA.TP
  Bottom 0.127: v23.95,14.77 23.95,14.32 22.14,12.52 | 22.14,12.52 v20.97,11.34 19.25,9.63 v19.25,7.4 21.16,5.5 v25.35,5.5 | 22.14,12.52 v21.41,13.25 17.16,17.5 16.78,17.5 5.98,6.71 v5.98,5.31
SWDCLK
  Top 0.127: U$1.P$AA24 33.73,13.94 36.65,13.94 40.46,17.75 TP_SWDCLK.TP 41.73,17.75 43.38,17.75 45.67,15.47 45.67,9.56 44.84,8.74 43.13,8.74 42.56,9.31 42.18,9.31 J1.4
SWDIO
  Top 0.127: 38.72,14.29 39.64,15.21 TP_SWDIO.TP | 38.72,14.29 37.86,13.44 33.73,13.44 U$1.P$AC24 | 38.72,14.29 41.1,11.91 41.1,10.71 40.91,10.52 40.91,9.37 J1.2
SWO  (via drill 0.3)
  Top 0.127: v32.97,11.91 32.78,12.1 32.78,12.93 U$1.P$AD22 | v19.63,32.04 15.38,32.04 14.74,32.68 TP_SWO.TP
  Bottom 0.127: v32.97,11.91 33.41,11.91 34.62,13.12 34.62,16.93 23.45,28.1 23.45,28.23 v19.63,32.04
VBAT/1.2A
  Top 0.3: U3.2 18.75,15.47 18.75,16.67 19.82,17.75 19.82,18.14 TP_VBAT.TP
VBAT/2.5C  (1 unrouted)
VBUS/1.5D  (via drill 0.3)
  Top 0.3: 20.78,27.79 20.4,27.79 | 20.4,27.79 19.32,27.79 C43.1 | 20.78,27.79 C42.1 | 20.84,28.04 20.84,28.3 21.03,28.49 21.03,28.99 J2.A9_B4 | 20.84,28.04 20.84,27.91 20.78,27.79 | v22.36,27.22 24.84,27.22 25.86,28.23 25.86,28.99 J2.A4_B9 | 20.84,28.04 v21.29,28.04 | 20.4,27.79 20.4,27.15 20.46,27.09 20.46,26.07 D3.5
  Bottom 0.3: v22.36,27.22 22.11,27.22 v21.29,28.04
VBUS/2.6D  (via drill 0.3)  (2 unrouted)
  Top 0.3: v27.76,12.36 27.76,12.93 U$1.P$AD2 | v27.06,10.26 26.37,10.26 25.73,10.9 C21.1
  Bottom 0.3: v27.76,12.36 27.76,10.96 v27.06,10.26
VREG  (via drill 0.3)  (1 unrouted)
  Top 0.3: IC9.A3 28.91,7.59 28.71,7.59 IC9.A2 28.52,7.59 28.21,7.59 IC9.A1 28.02,7.59 27.57,7.59 26.24,8.93 v25.67,8.93 | v24.78,8.93 24.78,9.05 24.27,9.56 C24.2 | 18.75,8.93 18.75,10.26 18.87,10.39 C39.1 | 18.75,8.93 18.75,8.67 | 18.75,8.67 18.75,8.29 IC1.B2 | TP_VREG.TP 18.43,2.26 17.92,2.77 17.92,8.38 18.21,8.67 18.75,8.67 | 18.75,8.93 v19.7,8.93
  Bottom 0.3: v25.67,8.93 v24.78,8.93 v19.7,8.93